# Altium PCB Button_Module.PcbDoc
Units mm, origin at the board's own origin, x right, y up, seen from the top; angles counter-clockwise.
Board outline 53.24 x 23.55 mm, 2 copper layers (Top Layer, Bottom Layer); 13 components, 12 nets, 53 pads, 4 vias.
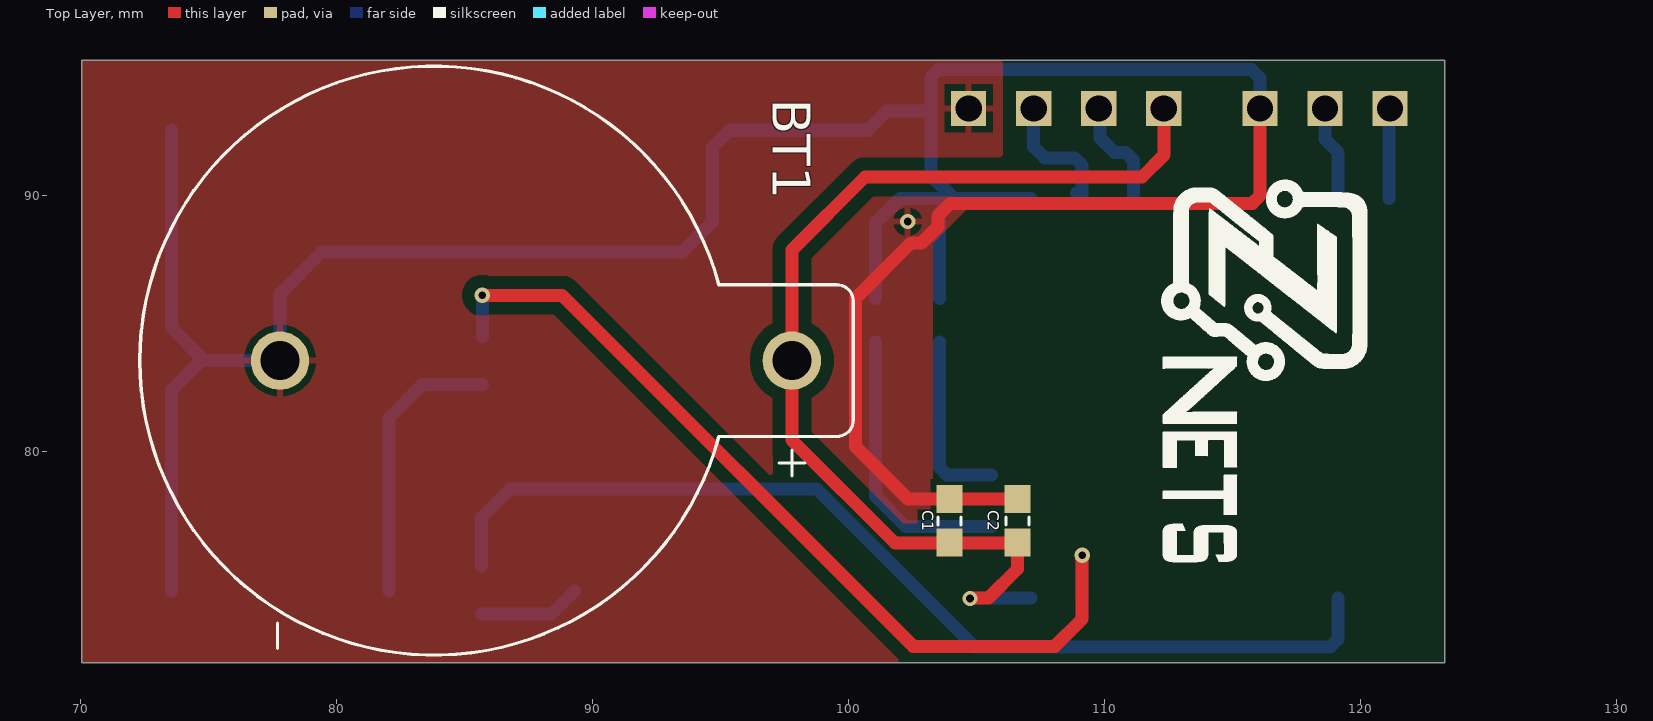
[diagram p0: Top Layer view]
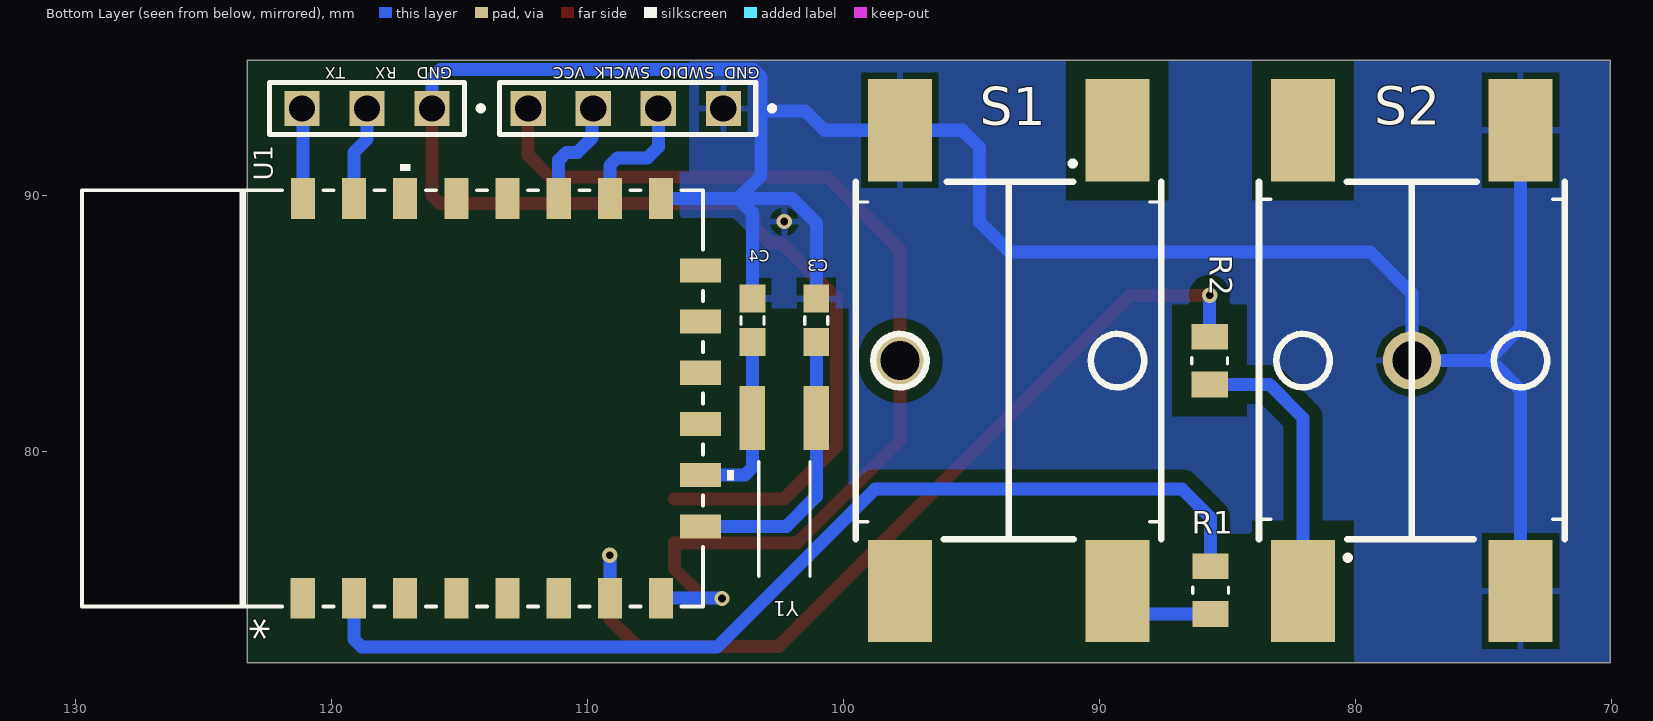
[diagram p1: Bottom Layer view, seen from below]
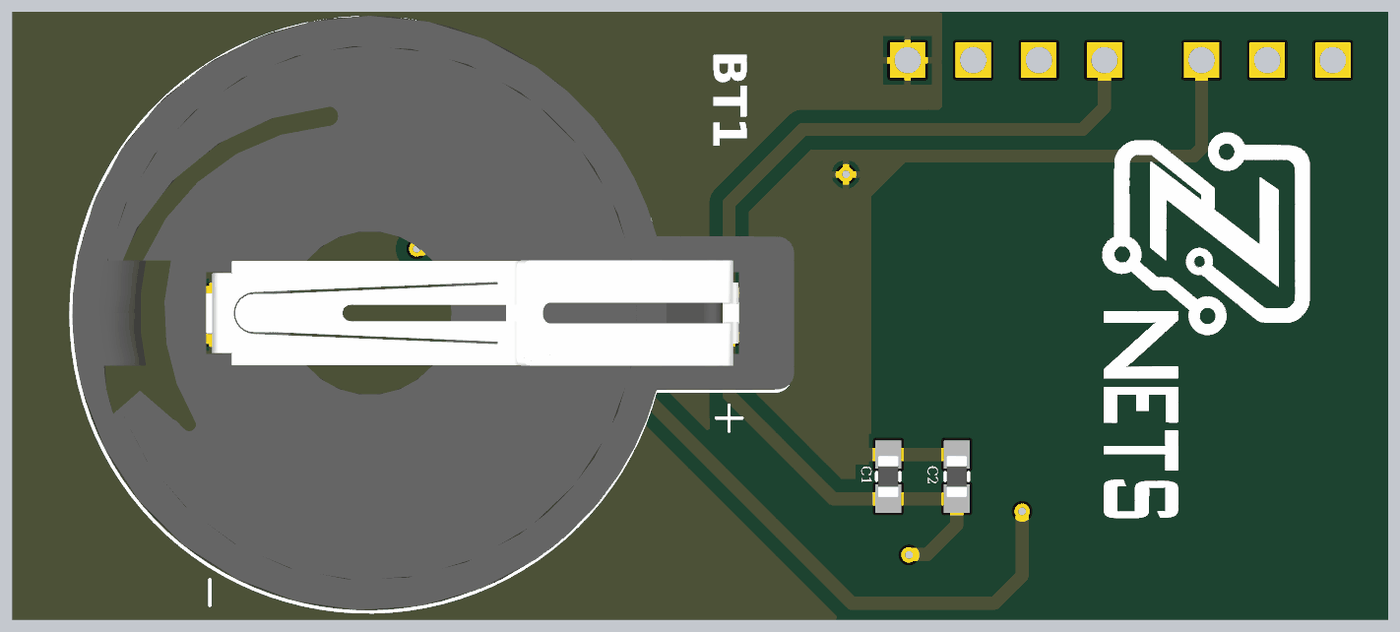
[diagram p2: 3D render of the assembled board from above, using the file's embedded part models]
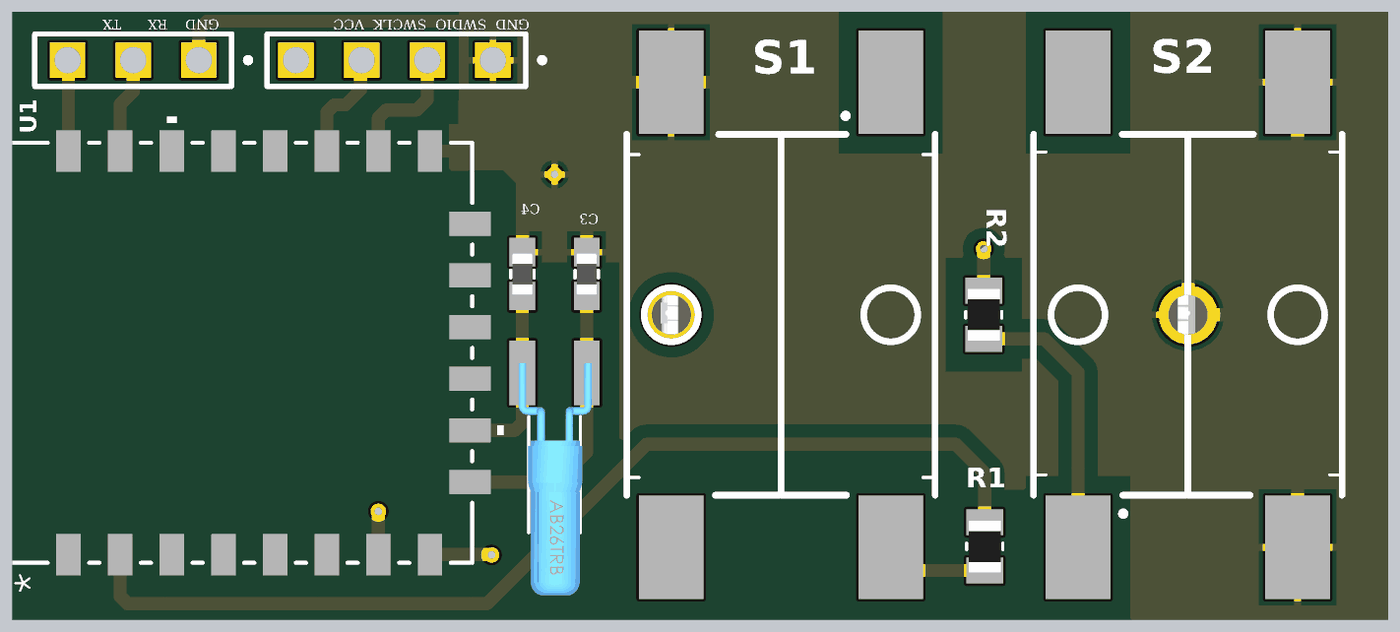
[diagram p3: 3D render of the assembled board from below, using the file's embedded part models]

## Layer stack, top to bottom
Top Solder: solder mask 0.0102, Solder Resist, Dk 3.5
Top Layer: signal copper 0.0356
Dielectric 1: dielectric 0.32, FR-4, Dk 4.8
Bottom Layer: signal copper 0.0356
Bottom Solder: solder mask 0.0102, Solder Resist, Dk 3.5

## Board outline
70.04,71.755 70.04,95.301 123.279,95.301 123.279,71.755

## Design rules (kind name [scope] priority, off if disabled: settings)
Clearance [All] p1: gap=0.508 ignorepadtopadclearanceinfootprint=FALSE except(0: Arc-Hole Track-Hole SMDPad-Hole THPad-Hole Via-Hole Text-Hole; 0.254: SMDPad-SMDPad; 0.762: SMDPad-Fill SMDPad-Poly SMDPad-Region)
PolygonConnect [All] p1: connectstyle=Relief reliefconductorwidth=0.254 reliefentries=4 polygonreliefangle="90 Angle" airgapwidth=0.254
RoomDefinition Button_Module [InComponentClass('Button_Module')] p1: confinementstyle=ConfineIn formatcopy=TRUE lockcomponents=FALSE outline 70,71.73 130,71.73 130,95.352 70,95.352
RoutingVias [All] p1: holewidth=0.711 width=1.27 viastyle="Through Hole" minholewidth=0.711 minwidth=1.27 maxholewidth=0.711 maxwidth=1.27
SolderMaskExpansion [All] p1: expansion=0.102 istentingtop=FALSE
Width [All] p1: maxlimit=0.762 minlimit=0.254 preferedwidth=0.508 minimp=50.000000 maximp=50.000000 favimp=50.000000
30 further rules are at their usual default settings.

## Components (designator, comment, footprint, x,y, rotation, side; value= is the part's Value field where it differs from the comment)
BT1 "Battery_CR2032" BAT_1066 83.907,83.566 r90 top
C1 "10uF" 22pF_Cap_0603 103.937,77.305 r90 top
C2 "100nF" 22pF_Cap_0603 106.591,77.305 r90 top
C3 "22pF" 22pF_Cap_0603 101.054,85.141 r90 bottom
C4 "22pF" 22pF_Cap_0603 103.543,85.141 r90 bottom
"GND    RX      TX" "Debug" Debug 116.065,93.421 r90 bottom (schematic designator "GND     TX     RX")
"GND  SWDIO  SWCLK  VCC" "Pin Header Male 6 Pin" Prog 104.686,93.421 r90 bottom (schematic designator J2)
R1 "3.3K" Resistor_0805 85.649,74.6 r270 bottom
R2 "3.3K" Resistor_0805 85.687,83.566 r270 bottom
S1 "ORMON_SW" ORMON_SW 93.535,83.566 r180 bottom
S2 "ORMON_SW" ORMON_SW 77.787,83.566 r0 bottom
U1 "PB-03F" PB-03F 117.615,82.093 r90 bottom
Y1 "XTAL-32.76KHZ" XTAL_32.768KHZ 102.298,77.445 r90 bottom

## Footprints (in the part's own frame and the unit in brackets; to place one, negate y for a bottom-side part, rotate by r counter-clockwise, add the part's x,y. Pads: shape width x height; smd on the part's side, far side on the other; paste and mask are expansions set on the pad)
22pF_Cap_0603 [mm]
  rect 1.1x1 smd: 1(-0.85,0) 2(0.85,0)
  silkscreen extent -0.15,-0.45 0.15,0.45, body extent -0.8,-0.4 0.8,0.4, height 0.9
BAT_1066 [mm]
  round 2.28 hole 1.52: N(0,6.13) P(0,-13.87)
  silkscreen extent -11.5,-16.27 11.5,11.61, body extent -11.43,-16.39 11.57,11.55, height 13.22
Debug [mm]
  rect 1.37x1.37 hole 1.02: 01(0,0) 02(0,2.54) 03(0,5.08)
  silkscreen extent -1.02,-2 1.02,6.35
ORMON_SW [mm]
  rect 2.5x4 smd: A(-4.25,9) B(4.25,9) C(-4.25,-9) D(4.25,-9)
  silkscreen extent -6,-6.99 6,7.8, body extent -6,-6.3 6,6.2, height 0.25
PB-03F [mil]
  rect 62.99x37 smd paste+0 mask+0: 1(-307.5,137.8) 2(-307.5,59.06) 3(-307.5,-19.69) 4(-307.5,-98.43) 5(-307.5,-177.17) 6(-307.5,-255.91) 7(-307.5,-334.65) 8(-307.5,-413.39) 15(307.5,-413.39) 16(307.5,-334.65) 17(307.5,-255.91) 18(307.5,-177.17) 19(307.5,-98.43) 20(307.5,-19.69) 21(307.5,59.06) 22(307.5,137.8)
  rect 37x62.99 smd paste+0 mask+0: 9(-196.86,-474.06) 10(-118.12,-474.06) 11(-39.38,-474.06) 12(39.36,-474.06) 13(118.1,-474.06) 14(196.84,-474.06)
  silkscreen extent -320,-525 360,478
Prog [mm]
  rect 1.37x1.37 hole 1.02: 01(0,0) 02(0,2.54) 03(0,5.08) 04(0,7.62)
  silkscreen extent -1.02,-2 1.02,8.74
Resistor_0805 [mm]
  rect 1x1.42 smd: 1(-0.935,0) 2(0.935,0)
  silkscreen extent -0.12,-0.7 0.12,0.7, body extent -1,-0.63 1,0.63, height 0.6
XTAL_32.768KHZ [mm]
  rect 2.5x1 smd: 1(3.875,1.25) 2(3.875,-1.25)
  silkscreen extent -2.31,-1 2.17,1, body extent -4.75,-1.44 4.25,1.4, height 2.27

## Part data
BT1: "THM Holder for 20mm Cell-Top Loading", Package=None, Check_prices=https://www.snapeda.com/parts/1066/Keystone/view-part/?ref=eda, MF="Keystone Electronics", MP=1066, SnapEDA_Link=https://www.snapeda.com/parts/1066/Keystone/view-part/?ref=snap
C1 C2 C3 C4: library part CC0603JPNPO9BN220, "22 pF Â±5% 50V Ceramic Capacitor C0G, NP0 0603 (1608 Metric)", Package="0603 Yageo", Check_prices=https://www.snapeda.com/parts/CC0603JPNPO9BN220/Yageo/view-part/?ref=eda, MF=Yageo, MP=CC0603JPNPO9BN220, SnapEDA_Link=https://www.snapeda.com/parts/CC0603JPNPO9BN220/Yageo/view-part/?ref=snap
"GND    RX      TX" "GND  SWDIO  SWCLK  VCC": Package=None, Availability=Unavailable, Price=None
  "GND    RX      TX": MP=TSW-101-23-L-T
  "GND  SWDIO  SWCLK  VCC": MP=MTSW-106-24-G-S-300
R1 R2: library part Resistor_0805, "Res 0805 330R 5% 125mW", Package="0805 Bourns", Check_prices=https://www.snapeda.com/parts/CR0805-JW-331ELF/Bourns/view-part/?ref=eda, MF=Bourns, MP=CR0805-JW-331ELF, SnapEDA_Link=https://www.snapeda.com/parts/CR0805-JW-331ELF/Bourns/view-part/?ref=snap
S1 S2: "Tactile Push Button Switch Momentary", Package=Package, Check_prices=https://www.snapeda.com/parts/TSD1265/Omten+Electronics/view-part/?ref=eda, MF="Omten Electronics", MP=TSD1265, SnapEDA_Link=https://www.snapeda.com/parts/TSD1265/Omten+Electronics/view-part/?ref=snap
U1: "Description", Manufacturer_Name=Ai-Thinker, Copyright="Copyright (C) 2025 Ultra Librarian. All rights reserved.", Manufacturer_Part_Number=PB-03F, RefDes=RefDes, Type=RF
Y1: "CRYSTAL 32.7680KHZ 12.5PF TH", Package="Cylindrical Can Radial  Abracon", Availability="Not in stock", Check_prices=https://www.snapeda.com/parts/AB26TRB-32.76KHZ/Abracon/view-part/?ref=eda, MF=Abracon, MP=AB26TRB-32.76KHZ, Price=None, SnapEDA_Link=https://www.snapeda.com/parts/AB26TRB-32.76KHZ/Abracon/view-part/?ref=snap

## Via types
v1: diameter 0.6, hole 0.3, Top Layer to Bottom Layer, 4 vias

## Nets (pads, with @x,y where several pads share a name; then routed paths per layer and width w, separated by ;. In a path a pad name is that pad's centre, name@x,y a point inside that pad or via, vN(x,y) a via of type N, cw(c..) or ccw(c..) an arc to the next point about the centre after c; other vN are vias at no path point)
Button_1: R2.1 U1.7 | length 35.3
  Top Layer w0.508: v1(85.687,86.119) 88.798,86.119 102.514,72.403 108.052,72.403 109.118,73.469 v1(109.118,75.959)
  Bottom Layer w0.508: R2.1 v1(85.687,86.119) ; U1.7 109.117,74.284 109.117,75.957 v1(109.118,75.959)
Button_2: R1.1 U1.2 | length 40.1
  Bottom Layer w0.508: R1.1 85.649,77.432 86.766,78.549 98.755,78.549 104.927,72.377 118.817,72.377 119.115,72.675 U1.2
GND: "GND    RX      TX.01" "GND  SWDIO  SWCLK  VCC.01" BT1.N C1.2 C2.2 C3.2 C4.2 S1.A S2.A S2.C U1.15 | length 121.9
  Top Layer w0.508: C2.2 C1.2 102.318,78.155 100.266,80.206 100.266,86.004 102.432,88.17 102.851,88.17 103.48,88.798 103.48,89.218 103.975,89.713 115.768,89.713 116.065,90.01 116.065,93.421
  Bottom Layer w0.508: S2.A 73.538,82.415 74.689,83.566 74.816,83.566 ; S2.C 73.538,84.844 74.816,83.566 ; C3.2 101.054,88.951 102.006,89.903 104.102,89.903 ; C4.2 103.543,89.344 104.102,89.903 ; U1.15 104.102,89.903 ; 116.065,93.421 116.065,94.602 115.735,94.932 103.502,94.932 103.204,94.635 103.204,93.32 ; 74.816,83.566 BT1.N 77.777,86.185 79.4,87.808 93.497,87.808 94.678,88.989 94.678,91.897 95.347,92.566 S1.A 100.732,92.566 101.486,93.32 103.204,93.32 ; 103.204,93.32 103.204,90.801 104.102,89.903
  other v1: 102.298,89
"NetGND     TX     RX_02": "GND    RX      TX.02" U1.21 | length 3.7
  Bottom Layer w0.508: 118.605,93.421 118.605,92.215 119.115,91.705 U1.21
"NetGND     TX     RX_03": "GND    RX      TX.03" U1.22 | length 3.5
  Bottom Layer w0.508: U1.22 121.115,93.426
NetR1_2: R1.2 S1.D | length 4
  Bottom Layer w0.508: R1.2 88.384,73.665 S1.D
NetR2_2: R2.2 S2.B | length 11
  Bottom Layer w0.508: S2.B 82.037,81.326 83.342,82.631 R2.2
SWCLK: "GND  SWDIO  SWCLK  VCC.03" U1.17 | length 4.3
  Bottom Layer w0.508: 109.766,93.421 109.811,93.377 109.811,92.272 110.388,91.694 110.817,91.694 111.115,91.396 U1.17
SWDIO: "GND  SWDIO  SWCLK  VCC.02" U1.16 | length 5.3
  Bottom Layer w0.508: 107.226,93.421 107.226,91.91 107.645,91.491 108.817,91.491 109.115,91.193 U1.16 U1.16@108.902,90.116
VCC: "GND  SWDIO  SWCLK  VCC.04" BT1.P C1.1 C2.1 U1.8 | length 41.5
  Top Layer w0.508: v1(104.737,74.27) 104.755,74.287 105.453,74.287 106.591,75.425 C2.1@106.591,76.441 ; C2.1 C2.1@106.591,76.441 ; 112.306,93.421 112.306,91.592 111.455,90.742 100.635,90.742 97.777,87.884 BT1.P 97.777,80.467 101.803,76.441 103.937,76.441 C2.1@106.591,76.441
  Bottom Layer w0.508: v1(104.737,74.27) 104.75,74.282 U1.8
XTAL_1: C3.1 U1.9 Y1.2 | length 11
  Bottom Layer w0.508: C3.1 101.051,84.288 101.051,81.322 Y1.2 101.048,78.263 102.219,77.092 U1.9
XTAL_2: C4.1 U1.10 Y1.1 | length 6.9
  Bottom Layer w0.508: C4.1 103.546,84.288 103.546,81.322 Y1.1 ; Y1.1@103.549,81.167 103.549,79.39 103.846,79.092 U1.10
pads on no net: S1.B S1.C S2.D U1.1 U1.3 U1.4 U1.5 U1.6 U1.11 U1.12 U1.13 U1.14 U1.18 U1.19 U1.20

## Polygon pours and split planes (outlines as drawn)
GND on Bottom Layer "GND_L02_P002" (solid, remove dead copper, pour order 2): 70.04,95.289 107.185,95.289 107.185,92.736 107.185,89.142 104.305,89.154 103.319,88.197 103.289,72.369 103.289,71.755 70.04,71.755
GND on Top Layer "GND_L01_P005" (solid, remove dead copper, pour order 5): 70.04,95.288 107.197,95.288 107.197,92.724 107.197,89.129 104.276,89.129 103.286,88.139 103.286,72.34 103.285,72.34 103.285,71.755 70.04,71.755

## Other copper
Top Layer:
  pour cut-out: 105.321,89.967 100.216,89.967 100.216,90.394 100.537,90.715 100.638,90.614 105.308,90.614 105.308,89.98
  pour cut-out: 97.009,80.467 97.028,79.142 97.028,78.778 97.184,78.778 97.975,79.569 97.077,80.467
  pour cut-out: 104.987,89.867 104.192,89.892 106.967,89.892 107.358,89.5 105.046,89.244 104.187,89.04
  pour cut-out: 106.018,93.421 106.018,95.225 106.043,95.225 106.106,95.225 109.476,95.225 109.476,90.945 106.018,90.945 106.018,91.01 106.015,93.422
Bottom Layer:
  pour cut-out: 84.176,76.797 84.049,76.797 83.617,76.365 83.617,71.755 87.636,71.755 88.026,72.145 88.026,74.79 86.182,74.79
  pour cut-out: 99.787,79.308 99.787,78.407 99.898,78.295 100.559,78.295 100.559,78.257 100.571,78.27 100.571,79.515 99.994,79.515
  pour cut-out: 106.007,95.313 109.766,95.313 110.096,94.983 110.096,92.38 108.318,90.602 107.975,90.945 106.02,90.945 106.007,93.396
Multi-Layer:
  pour cut-out: 100.355,74.498 100.355,76.987 100.584,76.987 100.871,76.7 100.871,74.338 100.515,74.338

## Silkscreen, mask and mechanical layers (free items; w line width, h text height)
Top Overlay:
  drawing of 6 lines, arcs and shapes, not listed
Mechanical 1:
  the board outline again, w0.025

## Text inside footprints (layer, text, board x,y; h text height)
U1: Bottom Overlay "*" at 121.895,72.644 h1.27 r270